# Altium PCB 2014_MiniYaourtPhone.PCBDOC
Units mil, origin at the board's own origin, x right, y up, seen from the top; angles counter-clockwise.
Board outline 669.29 x 2362.2 mil, 4 copper layers (1-TOP, 2-GND, 3-SIGNAL, 4-BOTTOM); 9 components, 10 nets, 51 pads, 19 vias.
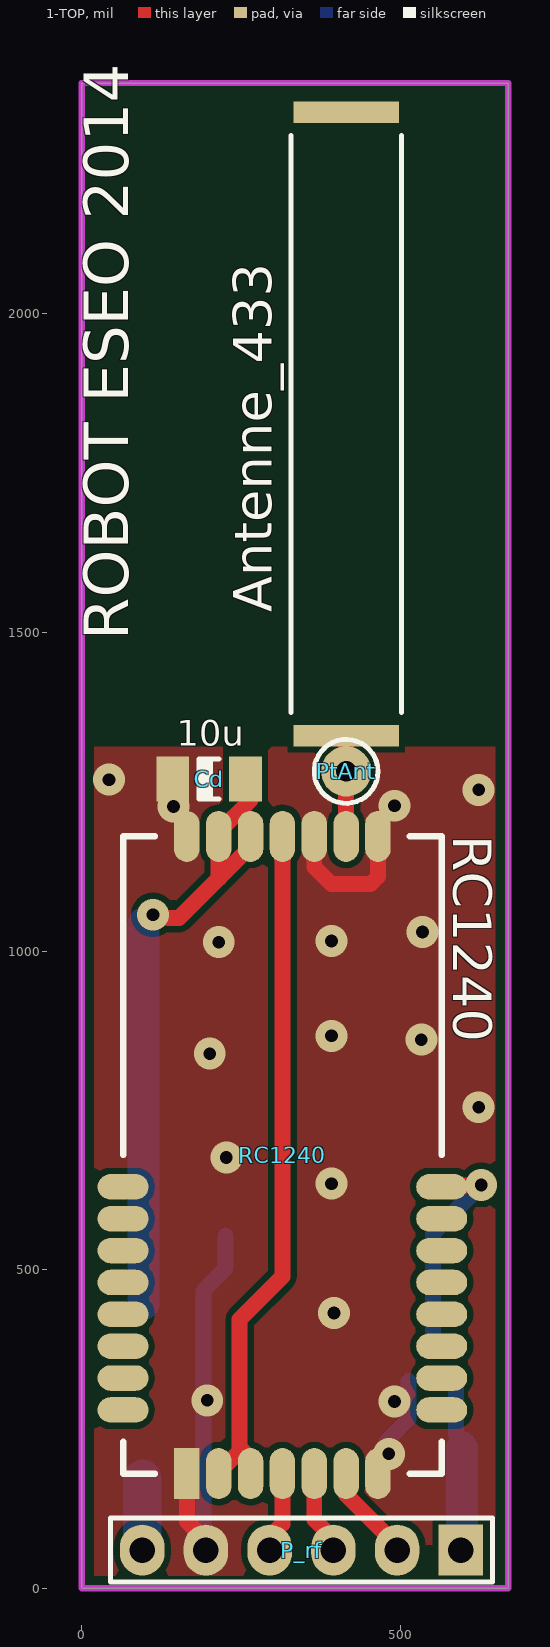
[diagram p0: 1-TOP view]
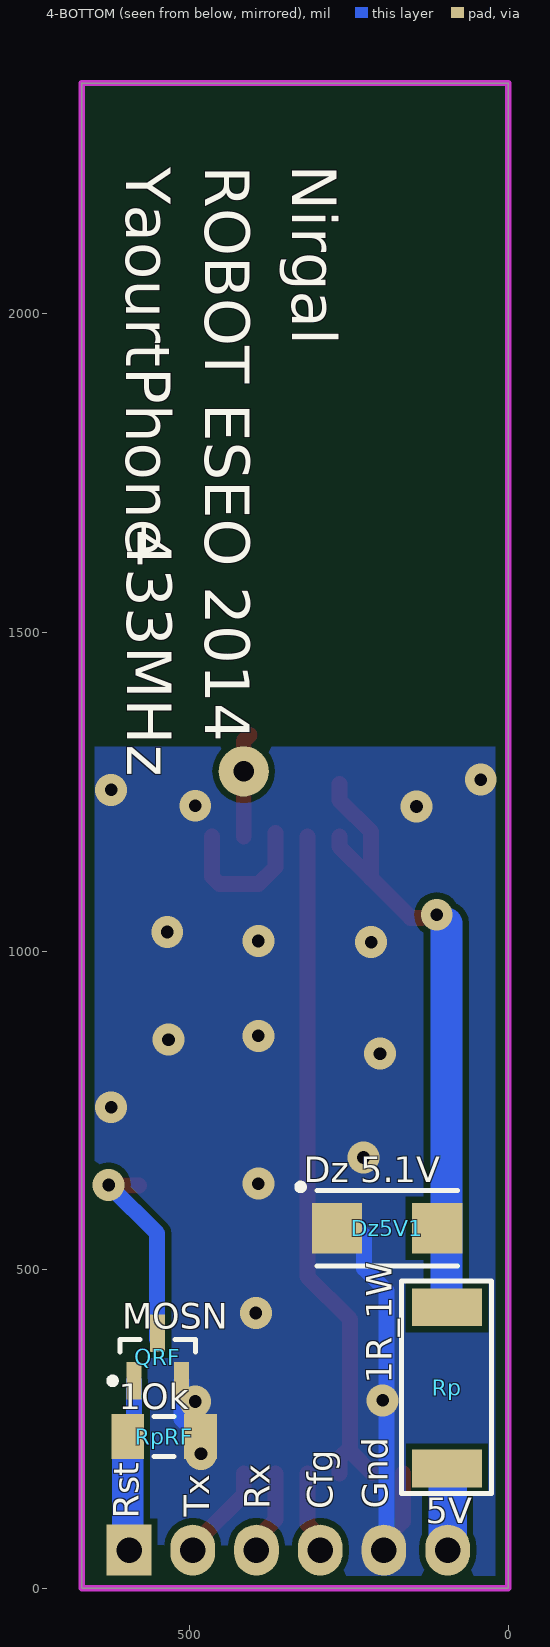
[diagram p1: 4-BOTTOM view, seen from below]
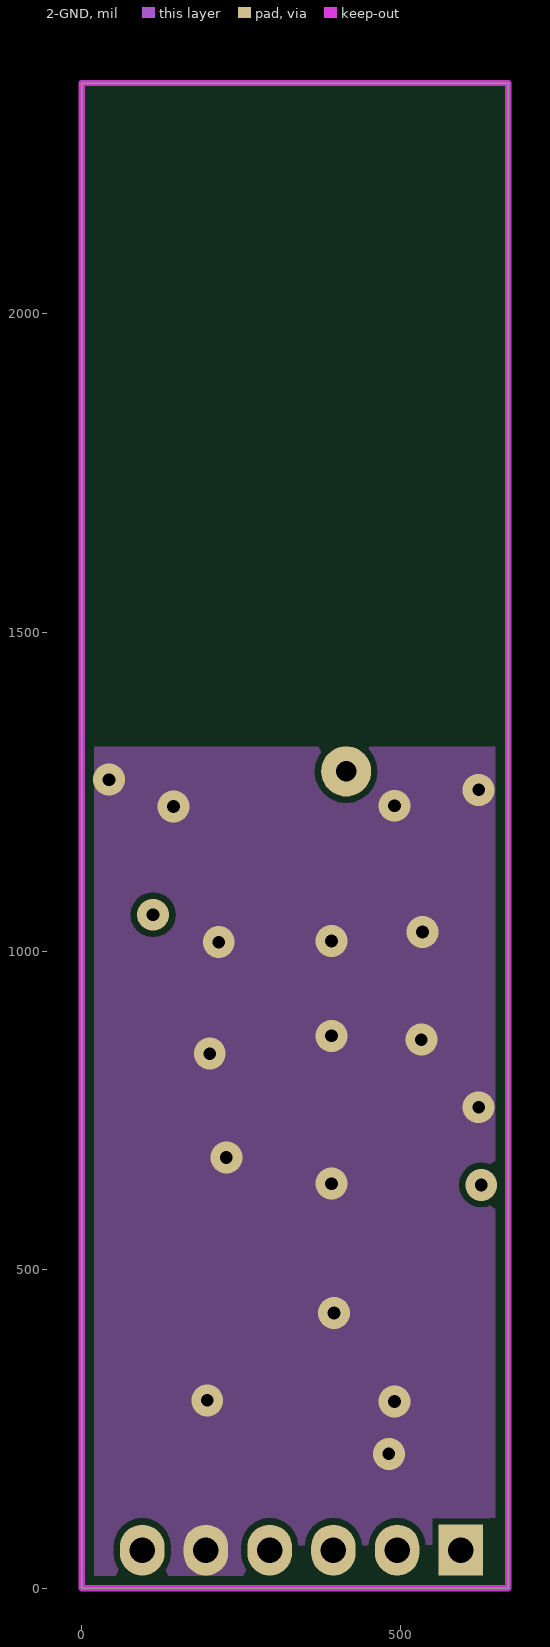
[diagram p2: 2-GND]
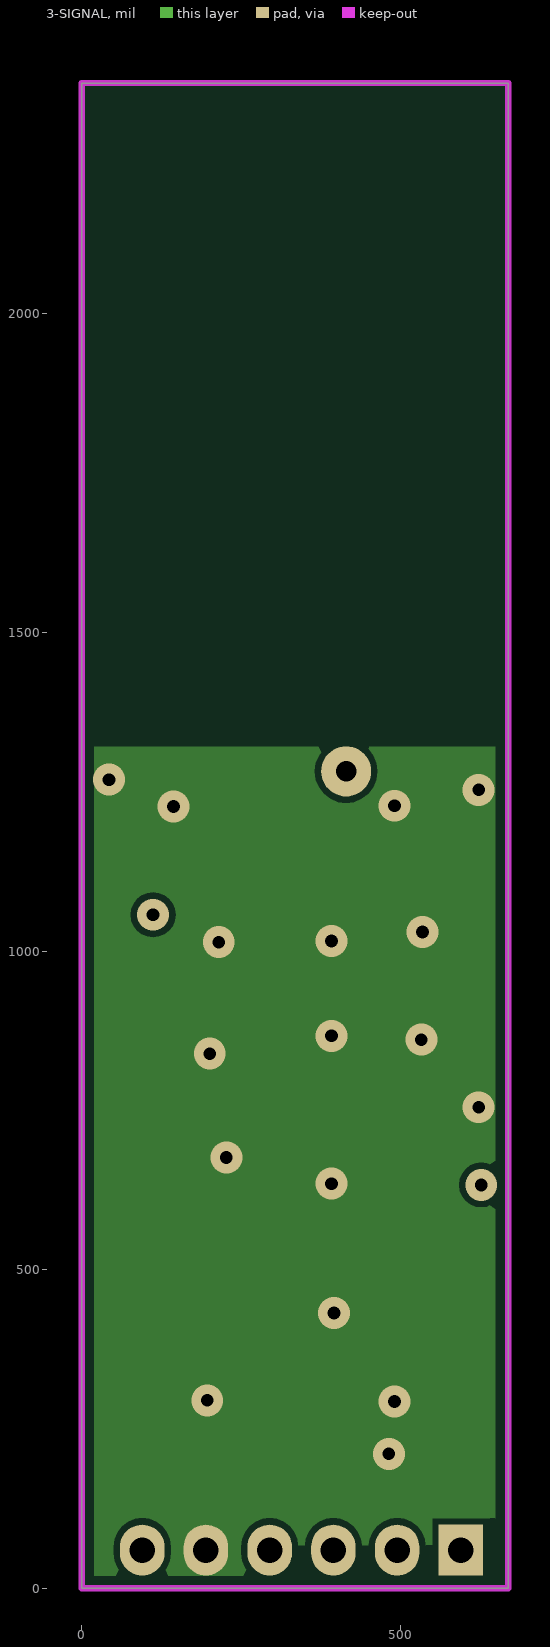
[diagram p3: 3-SIGNAL]
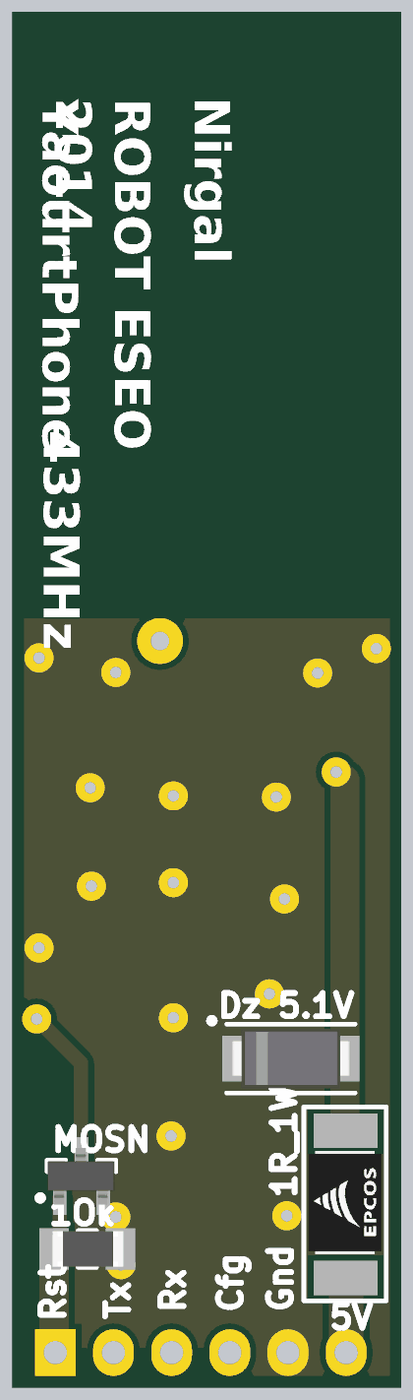
[diagram p4: 3D render of the assembled board from below, using the file's embedded part models]

## Layer stack, top to bottom
1-TOP: signal copper 1.4
Dielectric: prepreg 12.6, FR-4, Dk 4.8
2-GND: signal copper 1.4
Dielectric: core 12.6, FR-4, Dk 4.8
3-SIGNAL: signal copper 1.4
Dielectric: prepreg 12.6, FR-4, Dk 4.8
4-BOTTOM: signal copper 1.4

## Board outline
0,0 0,2362.2 669.29,2362.2 669.29,0

## Design rules (kind name [scope] priority, off if disabled: settings)
Clearance Clearance_1 [InNamedPolygon('1-GND') Or  InNamedPolygon('2-GND') Or  InNamedPolygon('3-GND') Or  InNamedPolygon('4-GND')] p1: gap=10
Clearance [All] p2: gap=7
FabricationTestPointUsage TestPointUsage [All] p1: valid=0 allowmultiple=FALSE
FabricationTestpoint Testpoint [All] p1: side=3 testpointundercomponent=TRUE minsize=40 maxsize=100 preferedsize=60 minholesize=0 maxholesize=40 preferedholesize=32 testpointgrid=1 allowsidetop=TRUE allowsidebottom=TRUE usegrid=TRUE gridtolerance=0.01
PlaneClearance [All] p1: clearance=10
PlaneConnect [All] p1: planeconnectstyle=Direct reliefexpansion=25 reliefentries=4 reliefconductorwidth=12 reliefairgap=15
PolygonConnect [All] p1: connectstyle=Direct reliefconductorwidth=10 reliefentries=4 polygonreliefangle="90 Angle"
RoomDefinition 2014_MiniYaourtPhone [InComponentClass('2014_MiniYaourtPhone')] p1: confinementstyle=ConfineIn formatcopy=TRUE lockcomponents=FALSE outline 1935.6,-203 2166.6,-203 2166.6,525 1935.6,525
RoutingLayers RoutingLayers_1 [All] p1: top layer_v5=TRUE mid layer 1_v5=FALSE mid layer 2_v5=FALSE bottom layer_v5=TRUE
RoutingLayers [All] p2: top layer_v5=TRUE mid layer 1_v5=FALSE mid layer 2_v5=FALSE bottom layer_v5=TRUE
RoutingVias [All] p1: holewidth=28 width=50 viastyle="Through Hole" minholewidth=28 minwidth=50 maxholewidth=28 maxwidth=50
SilkscreenOverComponentPads [All] p1: minsilkscreentomaskgap=10
SolderMaskExpansion [All] p1: expansion=0
Width [All] p1: maxlimit=150 minlimit=10 preferedwidth=15
22 further rules are at their usual default settings.

## Components (designator, comment, footprint, x,y, rotation, side; value= is the part's Value field where it differs from the comment)
Antenne_433 "433MHz" R1206_N#1 415,1827 r90 top
Cd "10nF" C1206_N 200,1270 r0 top
Dz5V1 "Diode Zener" "SMA Diode" 190,565 r180 bottom
P_rf "Header 6" HDR1X6 595,60 r180 top
PtAnt "POINT_TEST" POINT_TEST 415,1282 r90 top
QRF "Transistor MOSFET-N" SOT23-3N 550,363 r90 bottom
RC1240 "RC1240-Radiocraft" RC1240 165,180 r90 top
Rp "1R-1W" INDUCTANCE_CMS_1812 85,227 r90 bottom
RpRF "10k" R1206_N#2 540,238 r180 bottom

## Footprints (in the part's own frame and the unit in brackets; to place one, negate y for a bottom-side part, rotate by r counter-clockwise, add the part's x,y. Pads: shape width x height; smd on the part's side, far side on the other; paste and mask are expansions set on the pad)
C1206_N [mm] "Chip Capacitor, Body 3.2x1.6mm, IPC Medium Density"
  rect 1.3x1.8 smd: 1(-1.45,0) 2(1.45,0)
  silkscreen extent -0.4,-0.8 0.4,0.8, body extent -1.57,-0.81 1.63,0.79, height 1.02
HDR1X6 [mil]
  rect 70x80 hole 40: 1(0,0)
  oval 70x80 hole 40: 2(100,0) 3(200,0) 4(300,0) 5(400,0) 6(500,0)
  silkscreen extent -50,-50 550,50
INDUCTANCE_CMS_1812 [mil] "INDUCTANCE CMS 1812 ; DIMENSIONS : 4.5mm x 3.2mm"
  rect 59.06x110.24 smd: 1(-39,11) 2(214,11)
  silkscreen extent -78,-59 255,83, body extent 2,-51 179,75, height 127
POINT_TEST [mm] "PASTILLE TRAVERSANTE ; DIAMETRE = 2.5 mm ; DIAMETRE PERCAGE = 1.3 mm"
  round 2 hole 0.813: 1(0,0)
  silkscreen extent -1.27,-1.27 1.27,1.27
R1206_N#1 [mm] "Chip Resistor, Body 3.2x1.6mm, IPC Medium Density"
  rect 0.85x4.2 smd: 1(-12.425,0) 2(12.425,0)
  silkscreen extent -11.5,-2.2 11.5,2.2, body extent -12.85,-2.11 12.85,2.08, height 0.71
R1206_N#2 [mm] "Chip Resistor, Body 3.2x1.6mm, IPC Medium Density"
  rect 1.3x1.8 smd: 1(-1.45,0) 2(1.45,0)
  silkscreen extent -0.4,-0.8 0.4,0.8, body extent -1.68,-0.87 1.68,0.87, height 0.71
RC1240 [mil]
  round 40 on Top Overlay: 0(50,50)
  rect 80x40 smd: 1(0,0)
  oval 80x40 smd: 2(0,-50) 3(0,-100) 4(0,-150) 5(0,-200) 6(0,-250) 7(0,-300) 8(1000,-300) 9(1000,-250) 10(1000,-200) 11(1000,-150) 12(1000,-100) 13(1000,-50) 14(1000,0)
  oval 40x80 smd: 15(100,-400) 16(150,-400) 17(200,-400) 18(250,-400) 19(300,-400) 20(350,-400) 21(400,-400) 22(450,-400) 23(450,100) 24(400,100) 25(350,100) 26(300,100) 27(250,100) 28(200,100) 29(150,100) 30(100,100)
  silkscreen extent 0,-400 1000,100
"SMA Diode" [mm] "Case 403D-02"
  rect 2x2 smd: 1(-2,0) 2(2,0)
  silkscreen extent -3.58,-1.5 2.8,1.77, body extent -2.8,-1.46 2.79,1.46, height 2.41
SOT23-3N [mm] "SOT23, 3-Leads, Body 2.9x1.3mm, Pitch 0.95mm, Lead Span 2.5mm, IPC Medium Density"
  rect 1.5x0.6 smd: 1(-0.95,0.95) 2(-0.95,-0.95) 3(0.95,0)
  silkscreen extent -1.07,-1.5 0.7,1.93, body extent -1.24,-1.5 1.23,1.5, height 1.1

## Part data
Antenne_433: library part Resistor, "CAN4311129200431K"
Cd: library part Condensateur, "Capacitor"
Dz5V1: "Zener Diode"
P_rf: "Header, 6-Pin"
PtAnt: "POINT TEST"
QRF: "N-Channel MOSFET"
RC1240: "RC1240 - Radiocraft 433MHz Transceiver"
Rp RpRF: library part Resistor, "Resistor"

## Via types
v1: diameter 50, hole 20, 1-TOP to 4-BOTTOM, 19 vias

## Nets (pads, with @x,y where several pads share a name; then routed paths per layer and width w, separated by ;. In a path a pad name is that pad's centre, name@x,y a point inside that pad or via, vN(x,y) a via of type N, cw(c..) or ccw(c..) an arc to the next point about the centre after c; other vN are vias at no path point)
5V: Cd.2 Dz5V1.2 RC1240.12 RC1240.13 Rp.2 | length 955.7
  1-TOP w25: v1@136,1052 153,1052 215,1114 RC1240.13 215,1187 265,1237 Cd.2@265,1262 ; 216,1115 265,1164 RC1240.12
  4-BOTTOM w50: Rp.2@97,446 v1@97,1043
  other v1: 112,1057
5VIN: P_rf.6 Rp.1 | length 99
  4-BOTTOM w60: P_rf.6@95,73 Rp.1@95,172
ANTENNA: Antenne_433.1 PtAnt.1 RC1240.9 | length 162.7
  1-TOP w25: Antenne_433.1@406,1339 415,1330 PtAnt.1 RC1240.9
GND: Cd.1 Dz5V1.1 P_rf.5 QRF.2 RC1240.1 RC1240.7 RC1240.8 RC1240.10 RC1240.14 RpRF.2 | length 944.1
  1-TOP w25: RC1240.1 165,105 P_rf.5@189,81 ; RC1240.10@365,1185 RC1240.10 365,1132 392,1105 453,1105 465,1117 RC1240.8
  4-BOTTOM w25: P_rf.5@191,73 191,467 226,502 226,554 ; RpRF.2@479,232 512.6,265.6 QRF.2
  other v1: 482,211 491,293 197,295 396,432 392,635 227,676 623,755 201,839 533,861 392,867 215,1014 392,1016 535,1030 144,1227 491,1228 623,1253 43,1269
NetQRF_3: QRF.3 RC1240.22 | length 307.7
  1-TOP w25: RC1240.22@579,632 v1@616,632
  4-BOTTOM w25: QRF.3@551,391 551,557 v1@625,631
  other v1: 627,633
STR_RF_CONFIG: P_rf.4 RC1240.4 | length 112.9
  1-TOP w25: P_rf.4@291,77 315,101 RC1240.4
STR_RF_RESET: P_rf.1 QRF.1 RpRF.1 | length 227.9
  4-BOTTOM w25: RpRF.1@587.4,241.6 QRF.1
  4-BOTTOM w50: P_rf.1@597.09,77.09 RpRF.1@597.09,221
STR_RF_RX: P_rf.3 RC1240.5 | length 121.5
  1-TOP w25: RC1240.5 365,108 P_rf.3@400,73
STR_RF_TX: P_rf.2 RC1240.6 | length 127.8
  1-TOP w25: RC1240.6 415,147 P_rf.2@482,80
VDD_RC1240: RC1240.2 RC1240.3 RC1240.11 | length 1088.9
  1-TOP w25: RC1240.2@214,181 248,215 248,422 315,489 RC1240.11 ; 248,221 265,204 RC1240.3
pads on no net: Antenne_433.2 RC1240.0 RC1240.15 RC1240.16 RC1240.17 RC1240.18 RC1240.19 RC1240.20 RC1240.21 RC1240.23 RC1240.24 RC1240.25 RC1240.26 RC1240.27 RC1240.28 RC1240.29 RC1240.30

## Polygon pours and split planes (outlines as drawn)
GND on 1-TOP "1-GND" (solid, remove dead copper, pour order 1006): 20,1321 649,1321 649,20 20,20
GND on 2-GND "2-GND" (solid, remove dead copper, pour order 1006): 20,1321 649,1321 649,20 20,20
GND on 3-SIGNAL "3-GND" (solid, remove dead copper, pour order 1006): 20,1321 649,1321 649,20 20,20
GND on 4-BOTTOM "4-GND" (solid, remove dead copper, pour order 1006): 20,1321 649,1321 649,20 20,20

## Keep-outs
Keep-Out Layer:
  the board outline again, w10

## Silkscreen, mask and mechanical layers (free items; w line width, h text height)
Top Overlay:
  text "ROBOT ESEO 2014" at 97,1488 h120 r90
  text "10u" at 149,1322 h40
Bottom Overlay:
  text "Nirgal" at 362,2234 h120 r90
  text "ROBOT ESEO 2014" at 499,2232 h120 r90
  text "YaourtPhone" at 623,2230 h120 r90
  text "433MHz" at 621,1662 h120 r90
  text "Dz 5.1V" at 321,637 h40
  text "MOSN" at 606,407 h40
  text "1R_1W" at 183,321 h40 r270
  text "1Ok" at 611,281 h40
  text "Gnd" at 189,125 h40 r270
  text "Cfg" at 275,124 h40 r270
  text "Rx" at 374,124 h40 r270
  text "Tx" at 469,112 h40 r270
  text "Rst" at 580,109 h40 r270
  text "5V" at 129,102 h40

## Dimensions
0,0 to 669.29,0 on Mechanical 15
0,2362.2 to 0,0 on Mechanical 15